# EAGLE board attiny85 (EAGLE 9.6.2)
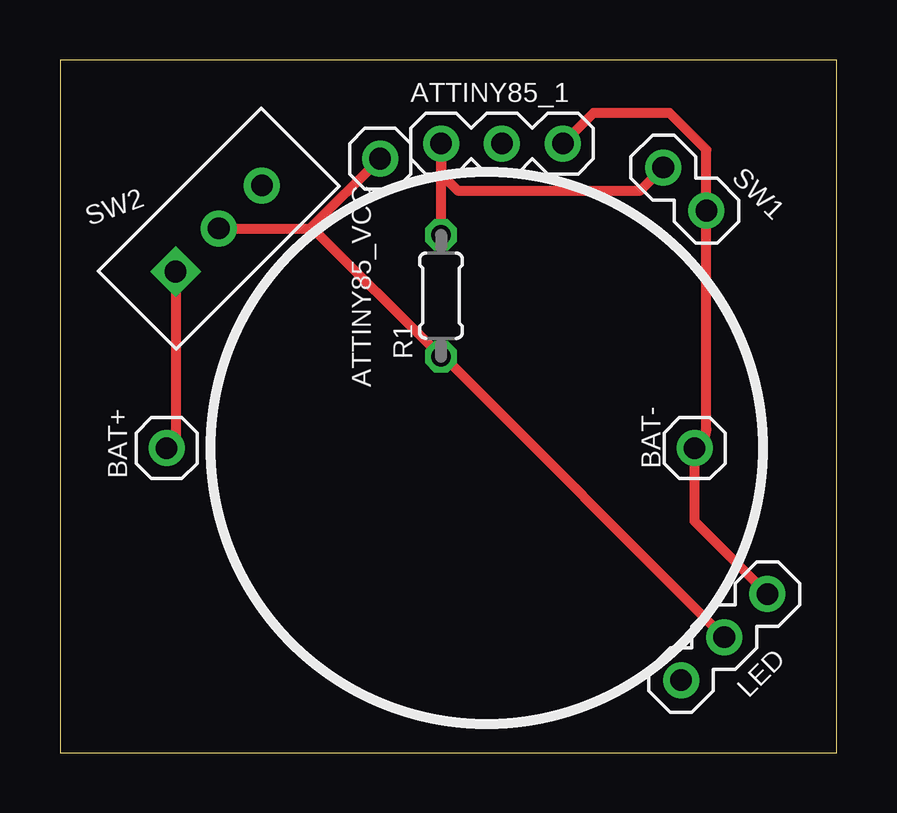
[diagram p0: board, top side]
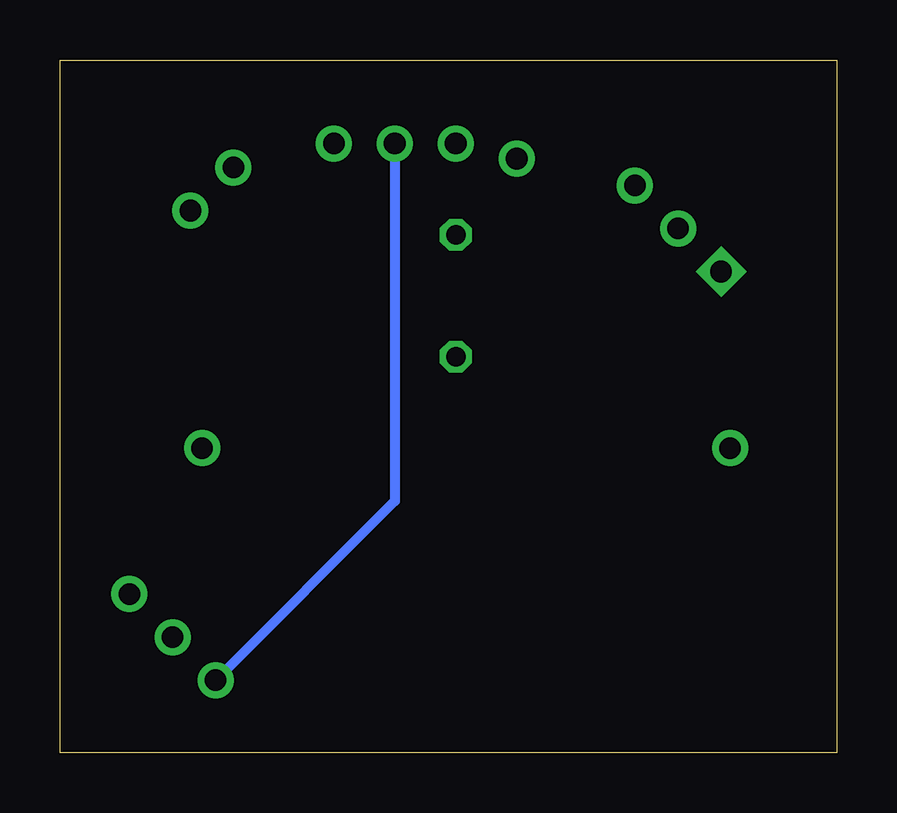
[diagram p1: board, bottom side, seen from below]

Size 32.37 x 28.88 mm. Coordinates in mm from the lower left corner, seen from the top.
Outline: 0,0 32.37,0 32.37,28.88 0,28.88 0,0
Copper layers (1*16): Top 0.035mm / dielectric 1.5mm / Bottom 0.035mm
Design rules "default": minimum track width 6mil, minimum drill 0.35mm, track to track 6mil, track to pad 6mil, pad to pad 6mil, via to via 6mil, smd to smd 6mil, copper to edge 40mil, drill to drill 6mil, minimum pad ring 10mil, minimum via ring 8mil, stop-mask expansion 4mil, vias tented up to drill 0mil, thermal gap 10mil

## Footprints (pad centres in the part's own frame; a part is rotated, then mirrored left to right if it is on the bottom)
PINHEAD-MA03-1 = drill 0.9 pad 1.5: 1 -1.27,0; 2 1.27,0; 3 3.81,0
PINHEAD-MA01-1 = drill 0.9 pad 1.5: 1 1.27,0
0204/5 = drill 0.813 octagon: 1 -2.54,0; 2 2.54,0
PINHEAD-MA02-1 = drill 0.9 pad 1.5: 1 -1.27,0; 2 1.27,0
SW3-1 = drill 0.9 pad 1.5 square: 1 -1.27,0 | drill 0.9 pad 1.5: 2 1.27,0; 3 3.81,0

## Placement (x,y rotation side)
ATTINY85_1  [PINHEAD-MA03-1]  19.69,25.4 180 top
ATTINY85_VCC  [PINHEAD-MA01-1]  12.07,24.77 0 top
BAT+  [PINHEAD-MA01-1]  3.17,12.7 0 top
BAT-  [PINHEAD-MA01-1]  25.17,12.7 0 top
LED  [PINHEAD-MA03-1]  28.58,5.71 225 top
R1  [0204/5]  15.88,19.05 270 top
SW1  [PINHEAD-MA02-1]  26.03,23.49 135 top
SW2  [SW3-1]  5.71,20.95 45 top

## Library data of the parts
ATTINY85_1 LED = ytani1; OC_FARNELL: unknown; OC_NEWARK: unknown
ATTINY85_VCC BAT+ BAT- SW1 = ytani1
R1 = rcl; SPICEPREFIX: R
SW2 = ytani1; MF: HiLetgo; URL_AMAZON: https://www.amazon.co.jp/gp/product/B01LYVYQNO/

## Nets
+3V3: BAT+.1 SW2.1
BAT+: ATTINY85_VCC.1 LED.2 R1.2 SW2.2
GND: ATTINY85_1.1 BAT-.1 LED.1 SW1.1
PB3: ATTINY85_1.3 R1.1 SW1.2
PB4: ATTINY85_1.2 LED.3

## Tracks (layer width: path | path; a pad name or v marks a point on that pad's centre or on a via)
+3V3
  Top 0.406: SW2.1 4.82,13.07 BAT+.1
BAT+
  Top 0.406: LED.2 15.98,16.51 R1.2 10.48,21.91 | SW2.2 10.42,21.85 10.48,21.91 | 10.48,21.91 ATTINY85_VCC.1
GND
  Top 0.406: LED.1 26.45,9.64 BAT-.1 26.85,13.11 26.93,13.49 SW1.1 26.93,25.14 25.4,26.67 22.23,26.67 ATTINY85_1.1
PB3
  Top 0.406: SW1.2 24.18,23.44 16.56,23.44 15.88,24.13 ATTINY85_1.3 R1.1
PB4
  Bottom 0.406: ATTINY85_1.2 18.41,10.49 LED.3